# Altium PCB EnviroNode.PcbDoc
Units mil, origin at the board's own origin, x right, y up, seen from the top; angles counter-clockwise.
Board outline 2780 x 1840 mil, 2 copper layers (Top Layer, Bottom Layer); 53 components, 47 nets, 266 pads, 136 vias.
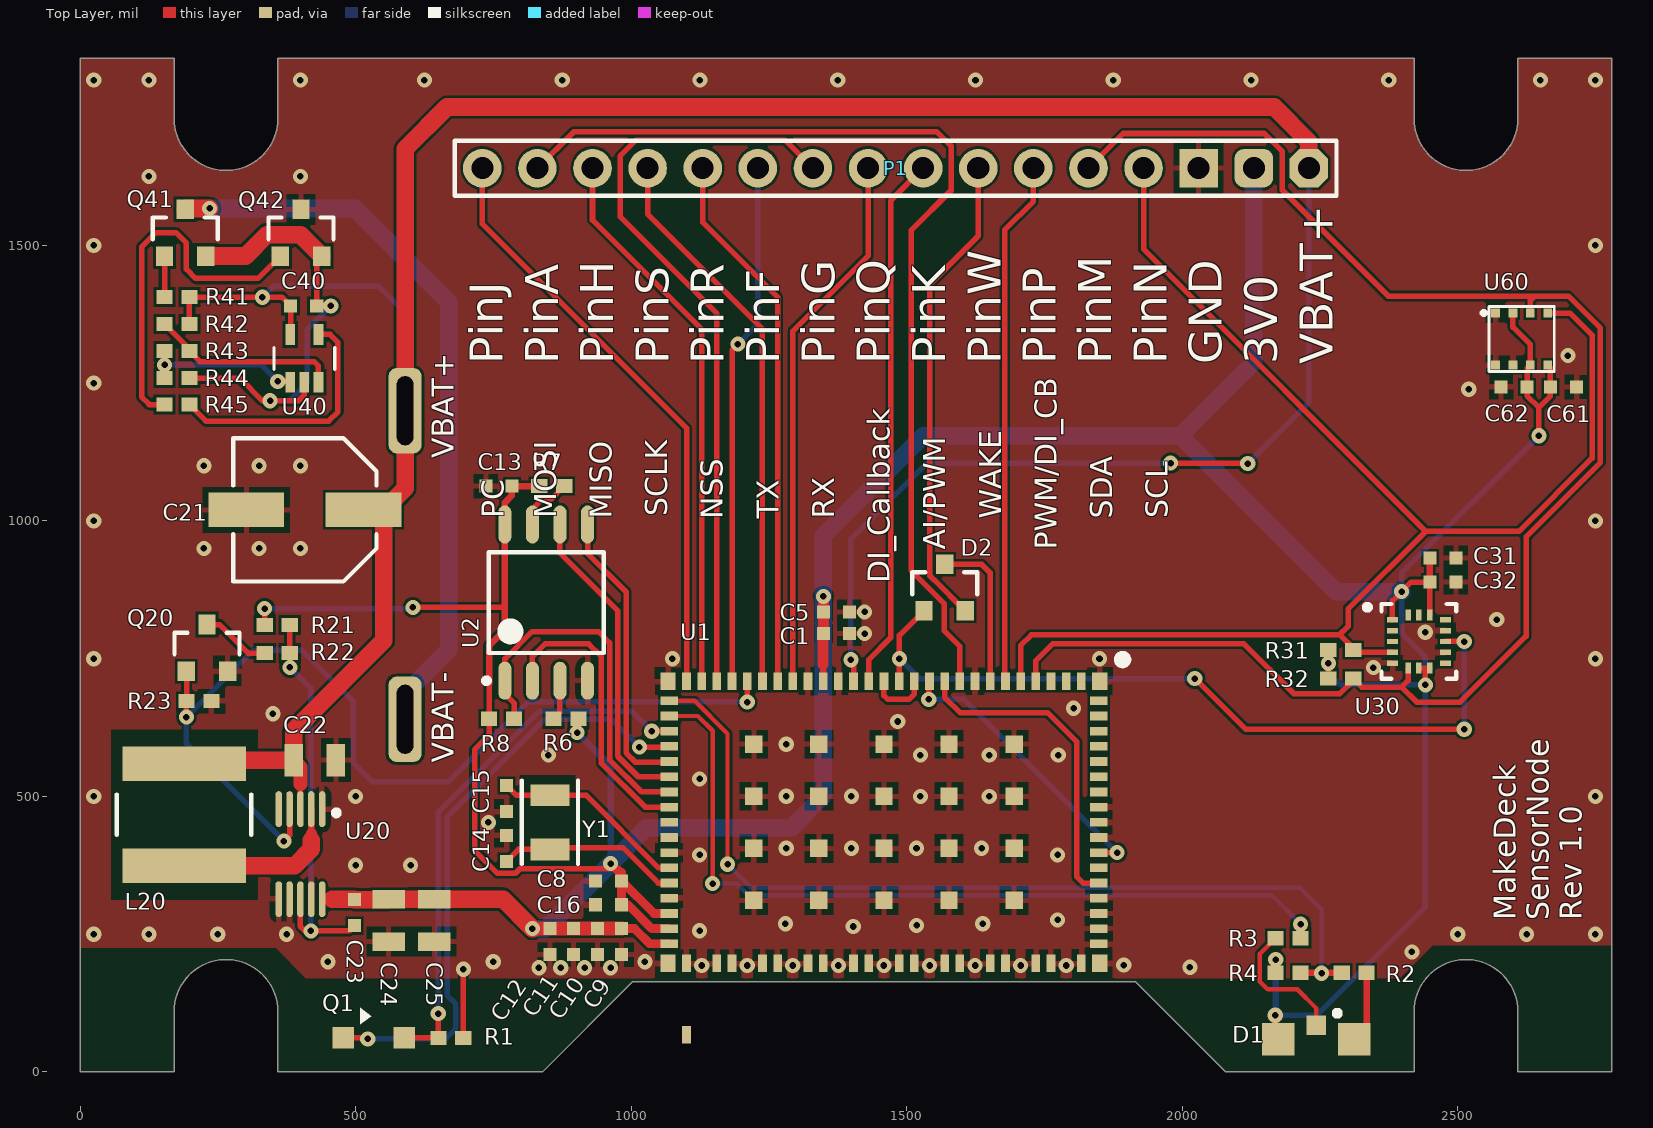
[diagram p0: Top Layer view]
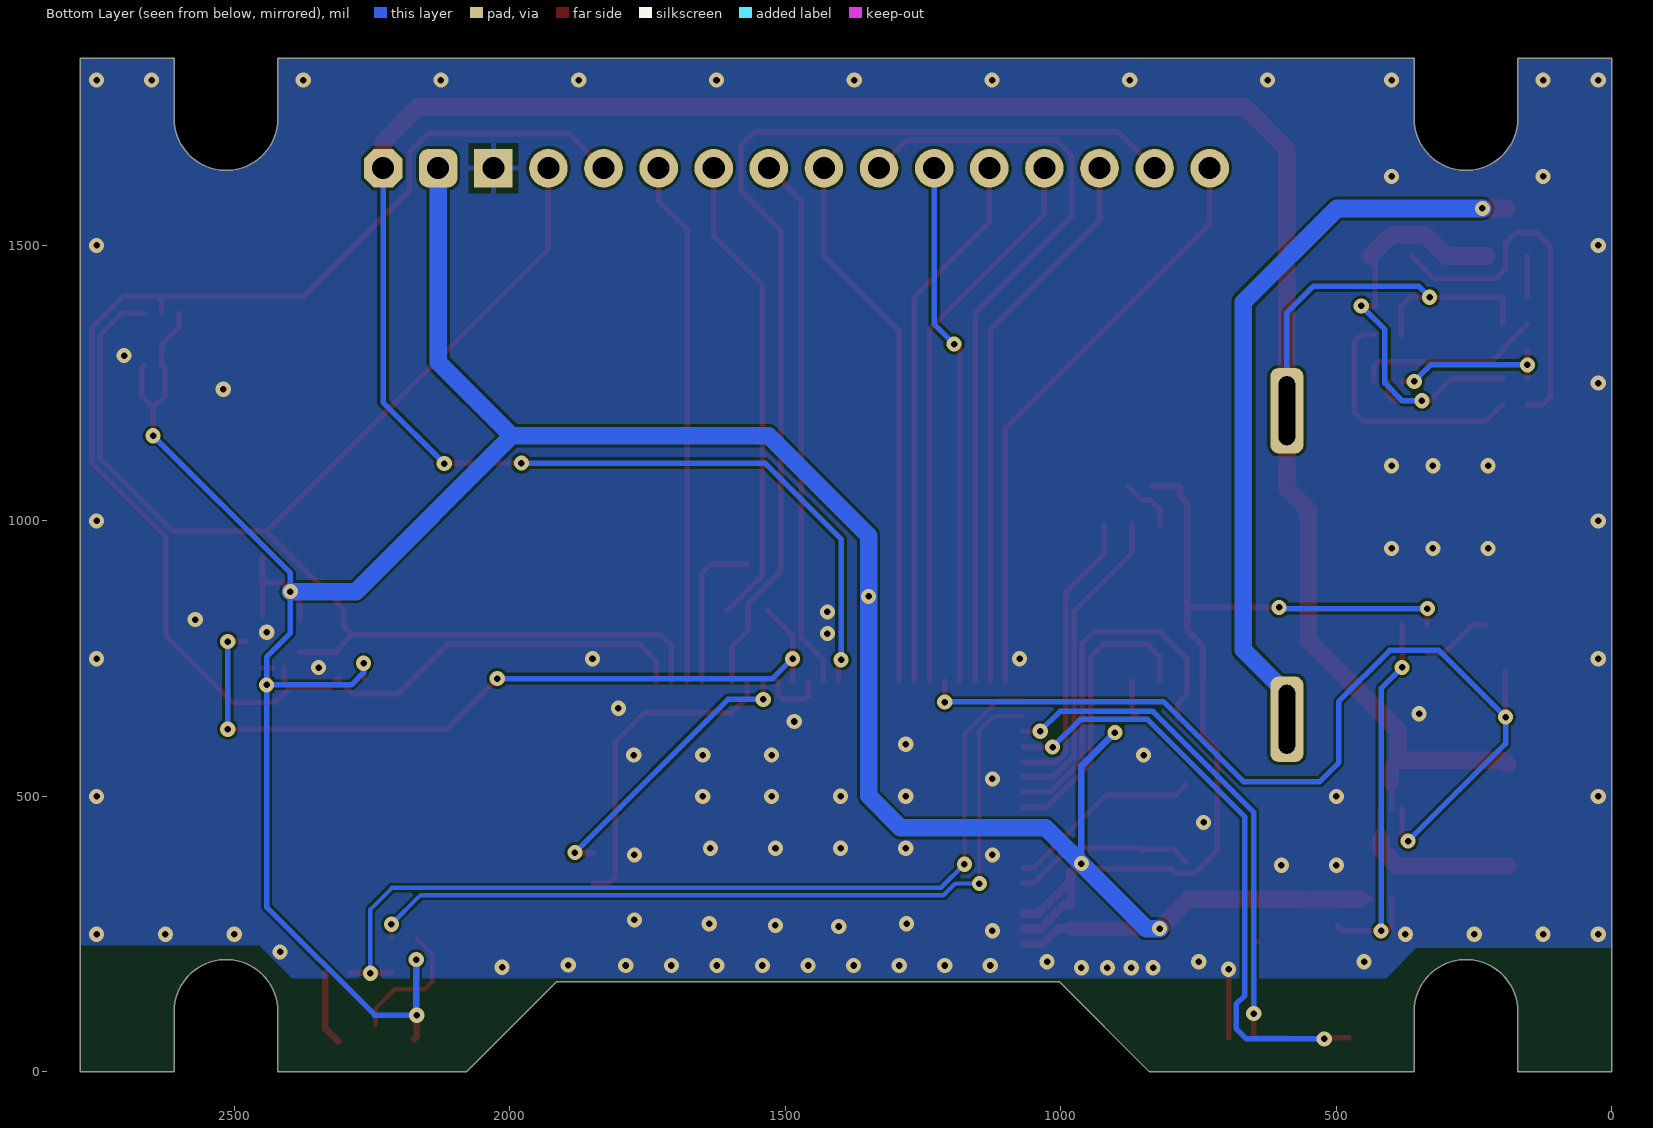
[diagram p1: Bottom Layer view, seen from below]
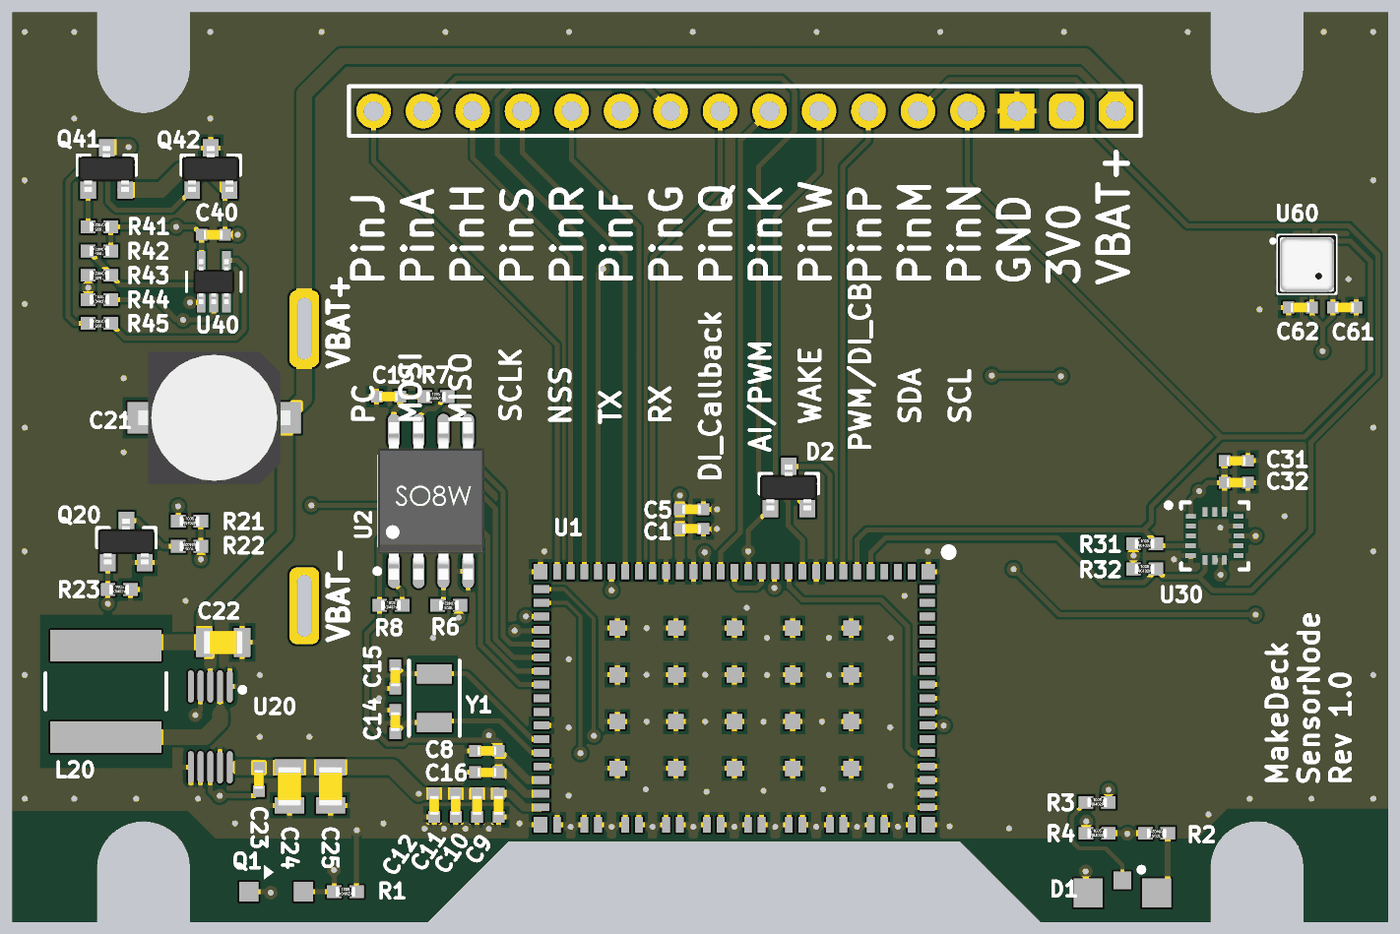
[diagram p2: 3D render of the assembled board from above, using the file's embedded part models]

## Layer stack, top to bottom
Top Solder: solder mask 0.4, Solder Resist, Dk 3.5
Top Layer: signal copper 1.4
Dielectric 1: dielectric 12.6, FR-4, Dk 4.8
Bottom Layer: signal copper 1.4
Bottom Solder: solder mask 0.4, Solder Resist, Dk 3.5

## Board outline
171,0 171,110 cw(c265,110) 359,110 359,0 839,0 1003,164 1450,164 1915,164 2079,0 2421,0 2421,110 cw(c2515,110) 2609,110 2609,0 2780,0 2780,1840 2609,1840 2609,1730 cw(c2515,1730) 2421,1730 2421,1840 359,1840 359,1730 cw(c265,1730) 171,1730 171,1840 0,1840 0,0

## Design rules (kind name [scope] priority, off if disabled: settings)
Clearance [All] p1: gap=5
PolygonConnect "Direct Connect GND Via" [InNet('GND') AND (IsVia)] p1: connectstyle=Direct reliefconductorwidth=10 reliefentries=4 polygonreliefangle="90 Angle" airgapwidth=10
PolygonConnect [All] p2: connectstyle=Relief reliefconductorwidth=10 reliefentries=4 polygonreliefangle="90 Angle" airgapwidth=10
RoutingVias [All] p1: holewidth=11.81 width=27.56 viastyle="Through Hole" minholewidth=11.81 minwidth=27.56 maxholewidth=19.68 maxwidth=31.5
SolderMaskExpansion [All] p1: expansion=4
Width "VBAT+ Power Trace" [(InNet('VBAT+') OR InNet('VBAT-'))] p1: maxlimit=32 minlimit=10 preferedwidth=32 minimp=50.000000 maximp=50.000000 favimp=50.000000
Width "L20 Trace" [InNet('NetL20_1')] p2: maxlimit=32 minlimit=10 preferedwidth=32 minimp=50.000000 maximp=50.000000 favimp=50.000000
Width "3V3 Power Trace" [InNet('3V3')] p3: maxlimit=60 minlimit=10 preferedwidth=16 minimp=50.000000 maximp=50.000000 favimp=50.000000
Width [All] p4: maxlimit=32 minlimit=6 preferedwidth=10 minimp=50.000000 maximp=50.000000 favimp=50.000000
30 further rules are at their usual default settings.

## Components (designator, comment, footprint, x,y, rotation, side; value= is the part's Value field where it differs from the comment)
C1 "CAP CER 0.1UF 10V X5R 0402" CAPC1005X07N#1 1372.58,795.59 r180 top
C5 "CAP CER 4.7UF 6.3V X5R 0402" CAPC1005X07N#1 1372.58,834.96 r180 top
C8 "CAP CER 0.1UF 10V X5R 0402" CAPC1005X07N#1 958.88,346.77 r0 top
C9 "CAP CER 0.1UF 10V X5R 0402" CAPC1005X07N#2 982.5,236.54 r90 top
C10 "CAP CER 0.1UF 10V X5R 0402" CAPC1005X07N#1 939.2,236.54 r90 top
C11 "CAP CER 4.7UF 6.3V X5R 0402" CAPC1005X07N#1 895.89,236.54 r90 top
C12 "CAP CER 4.7UF 6.3V X5R 0402" CAPC1005X07N#1 852.58,236.54 r90 top
C13 "CAP CER 1.0UF 6.3V X7R 0402" CAPC1005X07N#1 760,1063 r0 top
C14 "CAP CER 2pF 6.3V X7R 0402" CAPC1005X07N#1 773.84,405.83 r270 top
C15 "CAP CER 2pF 6.3V X7R 0402" CAPC1005X07N#1 773.84,496.38 r90 top
C16 "CAP CER 1.0UF 6.3V X7R 0402" CAPC1005X07N#1 958.88,303.46 r0 top
C21 "Polarized Capacitor" UWT1C221MCL1GS 408,1020 r180 top
C22 "CAP CER 22UF 6.3V X5R 0805" CAPC2012X14N 426,566 r180 top
C23 "CAP CER 15PF 50V C0G/NP0 0402" CAPC1005X07N#1 498,289 r90 top
C24 "CAP CER 10UF 10V X5R 0805" CAPC2012X14N 560,275 r90 top
C25 "CAP CER 22UF 6.3V X5R 0805" CAPC2012X14N 643,275 r90 top
C31 "CAP CER 1.0UF 6.3V X7R 0402" CAPC1005X07N#1 2473,933 r180 top
C32 "CAP CER 0.1UF 10V X5R 0402" CAPC1005X07N#1 2473,889 r180 top
C40 "CAP CER 0.1UF 10V X5R 0402" CAPC1005X07N#1 406,1390 r180 top
C61 "CAP CER 0.1UF 10V X5R 0402" CAPC1005X07N#1 2692,1243 r180 top
C62 "CAP CER 0.1UF 10V X5R 0402" CAPC1005X07N#1 2602.38,1243 r0 top
D1 "LED Red and Green" LTST-S326KGJRKT 2243,59.37 r0 top
D2 "Dual Schottky Diode" SOT95P300X130-3N 1569,879 r90 top
L20 "NR6028T4R7M" INDP6060X28N 189,467 r270 top
P1 "Header 16" HDR1X16 730,1640 r0 top
Q1 "PHOTOTRANSISTOR" PT12-21C 533,62 r0 top
Q20 "N-Channel MOSFET" SOT95P300X130-3N 230.4,769.68 r90 top
Q41 "N-Channel MOSFET" SOT95P300X130-3N 190.76,1523 r90 top
Q42 "N-Channel MOSFET" SOT95P300X130-3N 401,1523 r90 top
R1 "RES SMD 22K OHM 1% 1/16W 0402" RESC1005X04N 673,62 r0 top
R2 "RES SMD 100 OHM 5% 1/16W 0402" RESC1005X04N 2312,180 r180 top
R3 "RES SMD 100 OHM 5% 1/16W 0402" RESC1005X04N 2192,242.67 r0 top
R4 "RES SMD 10K OHM 1% 1/16W 0402" RESC1005X04N 2192,180 r0 top
R6 "RES SMD 100K OHM 5% 1/16W 0402" RESC1005X04N 882,641 r180 top
R7 "RES SMD 100K OHM 5% 1/16W 0402" RESC1005X04N 856,1063 r0 top
R8 "RES SMD 100K OHM 5% 1/16W 0402" RESC1005X04N 765,641 r0 top
R21 "RES SMD 220K OHM 1% 1/16W 0402" RESC1005X04N 358,811 r0 top
R22 "RES SMD 43K OHM 1% 1/16W 0402" RESC1005X04N 358,760 r180 top
R23 "RES SMD 100K OHM 5% 1/16W 0402" RESC1005X04N 216,673 r0 top
R31 "RES SMD 10K OHM 1% 1/16W 0402" RESC1005X04N 2287.94,765.45 r0 top
R32 "RES SMD 10K OHM 1% 1/16W 0402" RESC1005X04N 2287.94,714.27 r0 top
R41 "RES SMD 100K OHM 5% 1/16W 0402" RESC1005X04N 176,1406 r180 top
R42 "RES SMD 1M OHM 1% 1/16W 0402" RESC1005X04N 176,1357 r180 top
R43 "RES SMD 1M OHM 1% 1/16W 0402" RESC1005X04N 176,1308 r180 top
R44 "RES SMD 1M OHM 1% 1/16W 0402" RESC1005X04N 176,1259 r0 top
R45 "RES SMD 1M OHM 1% 1/16W 0402" RESC1005X04N 176,1211 r180 top
U1 "Murata Imp004m Module" LBEE5ZZ1MD 1458.88,453.07 r180 top
U2 "IC FLASH 128MBIT 104MHZ 8SOP" SOP127P790X216-8N 846,851.73 r90 top
U20 "XC9128" MSOP50P490X116-10N 400,395.31 r270 top
U30 "LIS3DHTR" LGA50P300X300X100-16N-ST 2429.67,781.2 r0 top
U40 "MIC841" SOT65P200X125-5N 407,1295 r90 top
U60 "BME680" BME680 2616,1330 r0 top
Y1 "XTAL_COMPACT" XTAL_32X15X09-2N 852.58,453.07 r90 top

## Footprints (in the part's own frame and the unit in brackets; to place one, negate y for a bottom-side part, rotate by r counter-clockwise, add the part's x,y. Pads: shape width x height; smd on the part's side, far side on the other; paste and mask are expansions set on the pad)
BME680 [mm]
  rect 0.4x0.4 smd: 1(-1.2,1.2) 2(-0.4,1.2) 3(0.4,1.2) 4(1.2,1.2) 5(1.2,-1.2) 6(0.4,-1.2) 7(-0.4,-1.2) 8(-1.2,-1.2)
  silkscreen extent -1.81,-1.5 1.5,1.5, body extent -1.5,-1.5 1.5,1.5, height 0.95
CAPC1005X07N#1 [mm]
  rect 0.6x0.6 smd: 1(-0.6,0) 2(0.6,0)
  body extent -0.5,-0.25 0.5,0.25, height 0.6
CAPC1005X07N#2 [mm]
  rect 0.6x0.6 smd: 1(-0.6,-0.002) 2(0.6,0)
  body extent -0.5,-0.25 0.5,0.25, height 0.6
CAPC2012X14N [mm]
  rect 0.85x1.5 smd: 1(-0.975,0) 2(0.975,0)
  body extent -1,-0.6 1,0.6, height 1.4
HDR1X16 [mil] "Connector; Header; 16 Position"
  round 70 hole 40: 1(0,0) 2(100,0) 3(200,0) 4(300,0) 5(400,0) 6(500,0) 7(600,0) 8(700,0) 9(800,0) 10(900,0) 11(1000,0) 12(1100,0) 13(1200,0)
  rect 70x70 hole 40: 14(1300,0)
  rrect50% 70x70 hole 40: 15(1400,0)
  oct 70x70 hole 40: 16(1500,0)
  silkscreen extent -50,-50 1550,50
INDP6060X28N [mm]
  rect 1.6x5.7 smd: 1(-2.35,0) 2(2.35,0)
  silkscreen extent -0.92,-3.1 0.92,3.1, body extent -3.1,-3.1 3.1,3.1, height 2.8
LBEE5ZZ1MD [mm] "Murata Imp004m Module"
  rect 0.7x0.8 smd: 1(-9.95,-6.5) 29(9.95,-6.5) 47(9.95,6.5) 66(-9.95,6.5)
  rect 0.4x0.8 smd: 2(-9.1,-6.5) 3(-8.4,-6.5) 4(-7.7,-6.5) 5(-7,-6.5) 6(-6.3,-6.5) 7(-5.6,-6.5) 8(-4.9,-6.5) 9(-4.2,-6.5) 10(-3.5,-6.5) 11(-2.8,-6.5) 12(-2.1,-6.5) 13(-1.4,-6.5) 14(-0.7,-6.5) 15(0,-6.5) 16(0.7,-6.5) 17(1.4,-6.5) 18(2.1,-6.5) 19(2.8,-6.5) 20(3.5,-6.5) 21(4.2,-6.5) 22(4.9,-6.5) 23(5.6,-6.5) 24(6.3,-6.5) 25(7,-6.5) 26(7.7,-6.5) 27(8.4,-6.5) 28(9.1,-6.5) 48(9.1,6.5) 49(7.7,6.5) 50(7,6.5) 51(5.6,6.5) 52(4.9,6.5) 53(3.5,6.5) 54(2.8,6.5) 55(1.4,6.5) 56(0.7,6.5) 57(-0.7,6.5) 58(-1.4,6.5) 59(-2.8,6.5) 60(-3.5,6.5) 61(-4.9,6.5) 62(-5.6,6.5) 63(-7,6.5) 64(-7.7,6.5) 65(-9.1,6.5) 104(9.1,9.8)
  rect 0.8x0.4 smd: 30(9.9,-5.6) 31(9.9,-4.9) 32(9.9,-4.2) 33(9.9,-3.5) 34(9.9,-2.8) 35(9.9,-2.1) 36(9.9,-1.4) 37(9.9,-0.7) 38(9.9,0) 39(9.9,0.7) 40(9.9,1.4) 41(9.9,2.1) 42(9.9,2.8) 43(9.9,3.5) 44(9.9,4.2) 45(9.9,4.9) 46(9.9,5.6) 67(-9.9,5.6) 68(-9.9,4.9) 69(-9.9,4.2) 70(-9.9,3.5) 71(-9.9,2.8) 72(-9.9,2.1) 73(-9.9,1.4) 74(-9.9,0.7) 75(-9.9,0) 76(-9.9,-0.7) 77(-9.9,-1.4) 78(-9.9,-2.1) 79(-9.9,-2.8) 80(-9.9,-3.5) 81(-9.9,-4.2) 82(-9.9,-4.9) 83(-9.9,-5.6)
  rect 0.8x0.8 smd: 84(-6,-3.6) 85(-3,-3.6) 86(0,-3.6) 87(3,-3.6) 88(6,-3.6) 89(6,-1.2) 90(6,1.2) 91(6,3.6) 92(3,3.6) 93(0,3.6) 94(-3,3.6) 95(-6,3.6) 96(-6,1.2) 97(-6,-1.2) 98(-3,-1.2) 99(0,-1.2) 100(3,-1.2) 101(3,1.2) 102(0,1.2) 103(-3,1.2)
  silkscreen extent -11.2,-7.7 -10.8,-7.3, body extent -10.5,-7.1 10.5,10.4, height 2
LGA50P300X300X100-16N-ST [mm]
  rect 0.5x0.25 smd paste+0 mask+0.025: 1(-1.225,1)
  rect 0.5x0.25 smd mask+0.025: 2(-1.225,0.5) 3(-1.225,0) 4(-1.225,-0.5) 5(-1.225,-1) 9(1.225,-1) 10(1.225,-0.5) 11(1.225,0) 12(1.225,0.5) 13(1.225,1)
  rect 0.25x0.5 smd mask+0.025: 6(-0.5,-1.225) 7(0,-1.225) 8(0.5,-1.225) 14(0.5,1.225) 15(0,1.225) 16(-0.5,1.225)
  silkscreen extent -2.5,-1.73 1.73,1.73, body extent -1.58,-1.58 1.58,1.58, height 1
LTST-S326KGJRKT [mm]
  rect 1.5x1.5 smd: A(-1.75,0) KR(1.75,0)
  rect 0.9x0.9 smd: KG(0,0.65)
  silkscreen extent 0.85,1.07 1.1,1.33, body extent -1.5,-1.5 1.5,0.5, height 1
MSOP50P490X116-10N [mm]
  oval 1.65x0.3 smd: 1(-2.075,1) 2(-2.075,0.5) 3(-2.075,0) 4(-2.075,-0.5) 5(-2.075,-1) 6(2.075,-1) 7(2.075,-0.5) 8(2.075,0) 9(2.075,0.5) 10(2.075,1)
  silkscreen extent -2.03,1.53 -1.78,1.78, body extent -1.55,-1.55 1.55,1.55, height 1.16
PT12-21C [mm]
  rect 1x1 smd: C(-1.4,0) E(1.4,0)
  silkscreen extent -0.63,0.63 -0.13,1.37, body extent -1.5,-1.51 1.5,0.5, height 1
RESC1005X04N [mm] "Chip Resistor, 2-Leads, Body 1.0x0.5mm, IPC Medium Density"
  rect 0.75x0.65 smd: 1(-0.575,0) 2(0.575,0)
  body extent -0.5,-0.25 0.5,0.25, height 0.35
SOP127P790X216-8N [mm] "SOP, 8-Leads, Body 5.23x5.28mm, Pitch 1.27mm, IPC Medium Density"
  oval 1.75x0.6 smd: 1(-3.6,1.905) 2(-3.6,0.635) 3(-3.6,-0.635) 4(-3.6,-1.905) 5(3.6,-1.905) 6(3.6,-0.635) 7(3.6,0.635) 8(3.6,1.905)
  silkscreen extent -3.72,-2.65 2.32,2.88, body extent -4.05,-2.73 4.05,2.73, height 1.75
SOT65P200X125-5N [mm]
  rect 0.95x0.45 smd paste+0 mask+0.05: 1(-1.1,0.65) 2(-1.1,0) 3(-1.1,-0.65) 4(1.1,-0.65) 5(1.1,0.65)
  silkscreen extent -0.5,-1.4 0.5,1.4, body extent -1.15,-1.05 1.15,1.05, height 1
SOT95P300X130-3N [mm]
  rect 0.9x0.8 smd: 1(-1.075,0.95) 2(-1.075,-0.95) 3(1.075,0)
  silkscreen extent -0.3,-1.5 0.7,1.5, body extent -1.17,-1.45 1.17,1.47, height 1
UWT1C221MCL1GS [mm]
  rect 3.5x1.6 smd: 1(-2.7,0) 2(2.7,0)
  silkscreen extent -3.3,-3.3 3.3,3.3, body extent -3.9,-3.4 3.9,3.4, height 8.05
XTAL_32X15X09-2N [mm] "TUNING FORK CRYSTAL, 2PIN"
  rect 1x1.8 smd: 1(-1.25,0) 2(1.25,0)
  silkscreen extent -1.92,-1.3 1.92,1.3, body extent -1.75,-0.9 1.75,0.9, height 0.9

## Part data
C21: "CAP,ALUM POLYMER,220uF,20%,16V,SMD"
D1: "LED, Dual, Side-view, Red-Green,2V, Common Anode, SMT"
D2: "DIODE, Schottky, 200mA, 30V, Dual, Common Cathode, SOT23"
L20: "FIXED IND 4.7UH 3A 40.3 MOHM SMD"
P1: "Header, 16-Pin"
Q1: "Phototrans, Clear, Side-view, 940nm, 0.4V, 1.14mA, SMT"
Q20: "NFET"
Q41 Q42: "NFET, 20V, 4.2A, SOT23"
U1: library part LBEE5ZZ1MD
U20: "IC, DC/DC boost,Adjustable, 6 VIN, 500mA, MSOP10"
U30: "IC, Accelerometer, 3-Axis, Low Power, 16-bit, LGA16"
U40: "IC, Comparator with Reference and Programmable Hysteresis, SOT-353"
U60: "Integrated Environmental Unit"
Y1: "XTAL, 32.768kHz, 20ppm, 6pF, 60K Ohm, 3215"

## Free pads (board coordinates)
  rrect50% 60x155 hole 30 slot 125 at 90 deg: 16(590,640) 16(590,1200)

## Via types
v1: diameter 27.56, hole 11.81, Top Layer to Bottom Layer, tented both sides, 136 vias

## Nets (pads, with @x,y where several pads share a name; then routed paths per layer and width w, separated by ;. In a path a pad name is that pad's centre, name@x,y a point inside that pad or via, vN(x,y) a via of type N, cw(c..) or ccw(c..) an arc to the next point about the centre after c; other vN are vias at no path point)
3V0: C1.2 C5.2 C8.2 C9.2 C10.2 C11.2 C12.2 C13.2 C16.2 C23.2 C24.2 C25.2 C31.2 C32.2 C61.2 C62.2 D1.A P1.15 R4.1 R6.1 R7.1 R8.1 R21.1 R31.1 R32.1 U1.19 U1.44 U1.45 U1.46 U2.8 U20.10 U30.1 U30.7 U30.8 U30.14 U60.2 U60.5 U60.6 | length 8093.3
  Top Layer w10: v1(335,841) 335.36,840.64 R21.1 ; v1(604,843) 769,843 771,841 ; 742.36,704.64 R8.1 742.36,611.38 716,585.02 716,402.28 757.89,360.39 789.8,360.39 797.98,368.58 972.5,368.58 978.57,368.58 978.57,362.52 ; R32.1 v1(2265.3,741.83) ; U30.1 2381.44,855.02 v1(2398.17,871.75) 2415.4,888.98 C32.2 U30.14 ; U30.7 2439.51,732.97 ; v1(2441.48,702.46) 2441.48,731 2439.51,732.97 ; U30.8 2439.51,732.97 ; U60.2 2600.25,1351.75 2631.75,1320.25 U60.6 2626,1277.01 C62.2 2626,1227 2647.5,1205.5 ; v1(2647.5,1154.5) 2647.5,1205.5 ; U60.5 2668.38,1277.62 C61.2 2668.38,1226.38 2647.5,1205.5
  Top Layer w12: U20.10 457.61,313.61 ; 742.36,704.64 742.36,773.36 771,802 771,841 U2.8 771,1033.24 783.62,1045.86 C13.2 R7.1 ; U1.19 1348.65,739.65 ; v1(2169,103) 2169,64.47 D1.A ; R4.1 2169.36,203.36 v1(2170,204) ; C32.2 C31.2
  Top Layer w16: v1(962.82,378.27) 972.5,368.58 978.57,362.52 ; C9.2 1006.13,260.16 1033.68,232.6 U1.46 ; 982.5,362.52 C8.2 ; U1.45 1037.62,260.16 994.32,303.46 C16.2 C8.2 ; U1.44 1041.56,287.72 C8.2
  Top Layer w20: 1348.65,739.65 1348.65,795.28 C1.2 C5.2 v1(1348.96,862.96)
  Top Layer w25: v1(821.09,260.16) C12.2 C11.2 C10.2 C9.2
  Top Layer w32: 457.61,313.61 497.01,313.61 C23.2 559.24,312.62 C24.2 C25.2 767.86,313.39 v1(821.09,260.16)
  Bottom Layer w10: v1(335,841) 602,841 v1(604,843) ; v1(2169,103) 2245,103 2441.48,299.48 v1(2441.48,702.46) ; v1(2265.3,741.83) 2265.3,724.7 2287.54,702.46 v1(2441.48,702.46) ; v1(2647.5,1154.5) 2398.17,905.17 v1(2398.17,871.75) 2398.17,796.31 2441.48,753 v1(2441.48,702.46)
  Bottom Layer w12: v1(902,616) 962.82,555.18 v1(962.82,378.27) ; v1(2169,103) 2170,104 v1(2170,204)
  Bottom Layer w32: v1(821.09,260.16) 844.71,260.16 v1(962.82,378.27) 1027.55,443 1291,443 1348.96,500.96 v1(1348.96,862.96) 1348.96,972.96 1530.5,1154.5 1996.5,1154.5 ; P1.15 2130,1288 1996.5,1154.5 ; v1(2398.17,871.75) 2279.25,871.75 1996.5,1154.5
ACCEL_INT: D2.1 U1.14 U30.11 | length 1417.6
  Top Layer w10: U1.14 1487,709.54 v1(1487,750) 1487,792.08 D2.1 ; v1(2023,714) 2115,622 v1(2512,622) ; U30.11 2511.8,781.2 v1(2512,781)
  Bottom Layer w10: v1(1487,750) 1523,714 v1(2023,714) ; v1(2512,622) v1(2512,781)
BT_REG_ON: U1.3
BT_UART_RXD: U1.12 U1.73 | length 524.1
  Top Layer w10: v1(1540,676) 1540,707.42 U1.12 ; U1.73 v1(1882,398) v1(1882,398)
  Bottom Layer w10: v1(1540,676) 1604,676 v1(1882,398)
BT_UART_TXD: U1.11 U1.71 | length 591.7
  Top Layer w10: U1.11 1569.12,679.88 1597,652 1756,652 1809,599 1809,354 1820.17,342.83 U1.71
GND: C1.1 C5.1 C8.1 C9.1 C10.1 C11.1 C12.1 C13.1 C14.1 C15.1 C16.1 C21.2 C22.1 C24.1 C25.1 C31.1 C32.1 C61.1 C62.1 P1.14 Q20.2 Q42.3 R1.2 R23.2 U1.1 U1.9 U1.18 U1.20 U1.29 U1.40 U1.43 U1.47 U1.48 U1.49 U1.50 U1.51 U1.52 U1.53 U1.54 U1.55 U1.56 U1.57 U1.58 U1.59 U1.60 U1.61 U1.62 U1.63 U1.64 U1.65 U1.66 U1.67 U1.68 U1.69 U1.70 U1.74 U1.75 U1.76 U1.84 U1.85 U1.86 U1.87 U1.88 U1.89 U1.90 U1.91 U1.92 U1.93 U1.94 U1.95 U1.96 U1.97 U1.98 U1.99 U1.100 U1.101 U1.102 U1.103 U2.4 U20.1 U20.6 U20.7 U20.9 U30.5 U30.10 U30.12 U60.1 U60.7 U60.8 | length 127.8
  Top Layer w10: C25.1 C25.1@646.39,236.61 ; R1.2 695.64,186.03 v1(695.9,186.29)
  other v1: 832.9,189.29 872.27,189.29 915.57,189.29 962.82,189.29 2014,190 1128.17,193.23 1210.85,193.23 1293.53,193.23 1376.2,193.23 1458.88,193.23 1541.56,193.23 1624.24,193.23 1706.91,193.23 1789.59,193.23 1894,194 450,200 750,200 1025,200 2417,218 25,250 125,250 250,250 375,250 2500,250 2625,250 2750,250 1124.24,256.22 1403,264 1518,266 1280,269 1638,269 1773.84,275.91 500,375 600,375 1124.24,394.02 1773.84,394.02 1281.72,405.83 1399.83,405.83 1517.94,405.83 1636.05,405.83 741,453 25,500 500,500 1281.72,500.32 1399.83,500.32 1525,500 1650,500 2750,500 1124.24,531.81 850,575 1525,575 1650,575 1775,575 1281.72,594.8 1484,636 350,650 1803,660 2346.99,733.95 25,750 1075,750 1850,750 2750,750 1423.76,795.59 2441,798 2571,821 1423.76,834.96 225,950 325,950 400,950 25,1000 2750,1000 225,1100 325,1100 400,1100 2520,1239 25,1250 2700,1300 25,1500 2750,1500 125,1625 400,1625 25,1800 125,1800 400,1800 625,1800 875,1800 1125,1800 1375,1800 1625,1800 1875,1800 2125,1800 2375,1800 2650,1800 2750,1800
IMP_WAKE: D2.3 U1.8 | length 286
  Top Layer w10: D2.3 1636.21,921.32 1651.8,905.74 U1.8
LED_GREEN: R3.2 U1.31 | length 1490.2
  Top Layer w8: U1.31 1121.02,645.98 1148,619 v1(1148,342) ; R3.2 2215,243.03 v1(2215,268)
  Bottom Layer w8: v1(1148,342) 1191.62,342 1212.62,321 2162,321 v1(2215,268)
LED_RED: R2.2 R4.2 U1.30 | length 1670.2
  Top Layer w8: U1.30 1115.46,673.54 1175,614 v1(1175,377)
  Top Layer w12: R4.2 R2.2
  Bottom Layer w8: v1(1175,377) 1217.88,334.12 1645.48,334.12 1645.6,334 2214,334 2253,295 v1(2253,179)
LPO_IN: U1.13 U1.15 | length 111
  Top Layer w10: U1.15 1458.88,683.12 1466,676 1504,676 1514,686 U1.13
NetC14_2: C14.2 U1.42 Y1.1 | length 332.2
  Top Layer w10: C14.2 795.5,403.86 Y1.1 855.77,407.05 985.22,407.05 1049.43,342.83 U1.42
NetC15_2: C15.2 U1.41 Y1.2 | length 357.2
  Top Layer w10: C15.2 791.56,502.28 Y1.2 918.27,502.28 1050.16,370.39 U1.41
NetC23_1: C23.1 R21.2 R22.1 U20.8 | length 725.7
  Top Layer w10: R21.2 R22.1 380.64,734.36 v1(381,734) ; U20.8 400,264 408,256 v1(419,256) 488.62,256 C23.1
  Bottom Layer w10: v1(381,734) 419,696 v1(419,256)
NetC40_1: C40.1 Q41.2 Q42.2 R44.2 U40.2 | length 852.7
  Top Layer w10: R44.2 290,1259 331,1218 v1(345,1218) 396,1218 407,1229 U40.2 ; Q42.2 429.62,1471.9 C40.1 v1(455,1390)
  Top Layer w32: Q41.2 300.44,1480.68 339.15,1519.39 388.04,1519.39 388.44,1519 400.08,1519 Q42.2
  Bottom Layer w10: v1(345,1218) 380,1218 412,1250 412,1347 v1(455,1390)
NetD1_KG: D1.KG R3.1 | length 243.3
  Top Layer w8: R3.1 2141,214.3 2141,164 2155,150 2209,150 2243,116 D1.KG
NetD1_KR: D1.KR R2.1 | length 133.2
  Top Layer w12: D1.KR@2311.9,56.24 2334.64,78.98 R2.1
NetL20_2: L20.2 U20.2 | length 315.5
  Top Layer w12: 419.69,432.31 U20.2
  Top Layer w20: 419.69,420.69 419.69,432.31
  Top Layer w32: L20.2 389.48,374.48 419.69,404.69 419.69,420.69
NetQ20_3: Q20.3 R22.2 | length 126.5
  Top Layer w10: Q20.3 253,812 305,760 R22.2
NetQ41_1: Q41.1 R41.2 | length 74.7
  Top Layer w10: R41.2 Q41.1
NetQ42_1: Q42.1 R45.2 | length 660.3
  Top Layer w10: R45.2 126,1211 112,1225 112,1497 138,1523 174,1523 193,1504 193,1457 210,1440 322.92,1440 Q42.1
NetR6_2: R6.2 U2.3 | length 73.8
  Top Layer w10: R6.2 871,652.64 U2.3
NetR7_2: R7.2 U2.7 | length 103.2
  Top Layer w10: U2.7 821,1022 837,1038 853.64,1038 R7.2
NetR8_2: R8.2 U1.36 U2.1 | length 679.1
  Top Layer w10: R8.2 787.64,669.36 771,686 U2.1 771,749.78 820.22,799 941,799 961.22,778.78 961.22,566.35 1019.38,508.19 U1.36
NetR42_2: R42.2 R43.1 U40.3 | length 342.4
  Top Layer w10: R42.2 198.64,1311.72 R43.1 217.64,1289 425,1289 432.59,1281.41 U40.3
NetR43_2: R43.2 R44.1 U40.1 | length 290
  Top Layer w10: R44.1 v1(153.36,1283) R43.2 ; v1(359,1253) 380.1,1253 U40.1
  Bottom Layer w10: v1(153.36,1283) 329,1283 v1(359,1253)
NetR45_1: R45.1 U40.4 | length 456.2
  Top Layer w10: R45.1 228.64,1181 451,1181 468,1198 468,1324 453.69,1338.31 U40.4
NetU1_34: U1.34 U2.5 | length 529.1
  Top Layer w10: U2.5 921,941 991.22,870.78 991.22,579.8 991.72,579.3 991.72,578.28 1007.91,562.09 1067.9,562.09 U1.34
NetU1_35: U1.35 U2.6 | length 572.6
  Top Layer w10: U2.6 871,942 976.22,836.78 976.22,573.58 976.72,573.08 976.72,572.07 1013.04,535.75 U1.35
NetU1_37: U1.37 U2.2 | length 537.9
  Top Layer w10: U2.2 821,754 844,777 923.1,777 946.22,753.88 946.22,560.14 1025.73,480.63 U1.37
OPTO_BIAS: Q1.C U1.33 | length 1101.2
  Top Layer w10: Q1.C 520.2,62 v1(522.2,60) ; v1(1015,589.65) 1067.9,589.65 U1.33
  Bottom Layer w10: v1(522.2,60) 663,60 682,79 682,123 666,139 666,463 843,640 964.65,640 v1(1015,589.65)
OPTO_IN: Q1.E R1.1 U1.32 | length 981.9
  Top Layer w10: Q1.E R1.1 650.36,105.64 v1(650,106) ; v1(1037.62,618.43) U1.32
  Bottom Layer w10: v1(650,106) 650,471 834,655 1001.05,655 v1(1037.62,618.43)
PINA: P1.2 U1.10 | length 1827.1
  Top Layer w10: P1.2 896,1706 1555,1706 1581,1680 1581,1600 1508,1527 1508,910 1568,850 1568,801 1596.68,772.32 U1.10
PINF: P1.6 U1.25 | length 950.4
  Top Layer w10: U1.25 1183.29,1310.29 v1(1194,1321)
  Bottom Layer w10: v1(1194,1321) 1230,1357 P1.6
PING: P1.7 U1.26 | length 1409
  Top Layer w10: U1.26 1155.73,1376.27 980,1552 980,1662 1009,1691 1279,1691 P1.7
PINH: P1.3 U1.27 | length 1013.1
  Top Layer w10: P1.3 930,1546 1128.17,1347.83 U1.27
PINJ: P1.1 U1.28 | length 1084.5
  Top Layer w10: P1.1 730,1539 1100.61,1168.39 U1.28
PINK: P1.9 U1.16 | length 971.9
  Top Layer w10: U1.16 1431.32,748.32 1471,788 1471,1581 P1.9
PINP: P1.11 U1.7 | length 953.1
  Top Layer w10: U1.7 1678,710.33 1678,1528 1730,1580 P1.11
PINQ: P1.8 U1.21 | length 987.6
  Top Layer w10: U1.21 1293.53,1344.53 1430,1481 P1.8
PINR: P1.5 U1.22 | length 987.3
  Top Layer w10: P1.5 1130,1542 1265.97,1406.03 U1.22
PINS: P1.4 U1.23 | length 1017.3
  Top Layer w10: P1.4 1030,1557 1238.41,1348.59 U1.23
PINW_OR: D2.2 P1.10 | length 866.7
  Top Layer w10: D2.2 1549.47,893.61 1549.11,893.61 1542,900.72 1542,1429 1630,1517 P1.10
PSU_EN: Q20.1 R23.1 U1.24 U20.4 | length 1781.3
  Top Layer w10: v1(193,644) 193,672.64 R23.1 193.36,726.99 Q20.1 ; v1(370,419) 380.32,429.32 U20.4 ; v1(1210.85,671.15) U1.24
  Bottom Layer w10: v1(370,419) 193,596 v1(193,644) 314,765 403,765 496,672 496,561 530,527 669,527 814,672 1210,672 v1(1210.85,671.15) v1@1216,666
SCL: P1.13 R31.2 U1.6 U30.4 U60.4 | length 2563.7
  Top Layer w10: U1.6 1706.91,773.91 1726.24,793.24 2286.28,793.24 ; P1.13 1930,1493 2442,981 ; U30.4 2314.51,761.51 R31.2 2310.57,768.95 2286.28,793.24 ; U60.4 2703.76,1377.24 2744,1337 2744,1114 2611,981 2442,981 ; 2286.28,793.24 2286,793.52 2301.24,808.76 2301.24,840.24 2442,981
SDA: P1.12 R32.2 U1.5 U30.6 U60.3 | length 2889.7
  Top Layer w10: U1.5 1734.47,746.47 1765,777 2112,777 2202.53,686.47 2286.28,686.47 2310.57,710.77 R32.2 2326.32,698.52 2398.17,698.52 ; P1.12 1893,1703 2149,1703 2182,1670 2182,1600 2374,1408 2640,1408 ; U30.6 2409.98,710.33 2398.17,698.52 ; U60.3 2631.75,1400.75 2632.75,1400.75 2640,1408 ; 2398.17,698.52 2425.69,671 2504,671 2624,791 2624,971 2759,1106 2759,1350 2701,1408 2640,1408
VBAT+: C21.1 C22.2 C40.2 L20.1 P1.16 pad.16@590,1200 R41.1 R42.1 U1.17 U20.3 U40.5 | length 5611
  Top Layer w10: R42.1 R41.1 v1(331,1406) 366.38,1406 C40.2 382.38,1339.28 U40.5 U40.5@381.72,1338 ; U20.3 400,514.69 ; v1(1399,748) 1400,748 1403.76,744.24 U1.17 ; v1(1979,1105) 2118,1105 v1(2119,1104)
  Top Layer w12: 400,514.69 400,522
  Top Layer w25: C22.2 400,553.61 400,522
  Top Layer w32: L20.1 195.48,566 C22.2 387.61,619.61 551,783 551,1020 590,1059 590,1200 590,1675 666,1751 2167,1751 2230,1688 P1.16
  Bottom Layer w10: v1(331,1406) 351,1426 542,1426 590,1378 pad.16@590,1200 ; v1(1399,748) 1399,967 1537,1105 v1(1979,1105) ; v1(2119,1104) 2230,1215 P1.16
VBAT-: pad.16@590,640 Q41.3 | length 1339.1
  Top Layer w32: Q41.3 192.44,1567 v1(235,1567)
  Bottom Layer w32: v1(235,1567) 499,1567 669,1397 669,766 590,687 pad.16@590,640
pads on no net: U1.2 U1.4 U1.38 U1.39 U1.72 U1.77 U1.78 U1.79 U1.80 U1.81 U1.82 U1.83 U1.104 U20.5 U30.2 U30.3 U30.9 U30.13 U30.15 U30.16

## Polygon pours and split planes (outlines as drawn)
GND on Top Layer "Top Layer-GND" (solid, remove dead copper, pour order 3): 0,225 355,225 410,170 2395,170 2455,230 2780,230 2780,1840 2609,1840 2609,1730 cw(c2515,1730) 2421,1730 2421,1840 359,1840 359,1730 cw(c265,1730) 171,1730 171,1840 0,1840
GND on Bottom Layer "Bottom Layer-GND" (solid, pour order 4): 0,225 355,225 410,170 2395,170 2455,230 2780,230 2780,1840 2609,1840 2609,1730 cw(c2515,1730) 2421,1730 2421,1840 359,1840 359,1730 cw(c265,1730) 171,1730 171,1840 0,1840

## Other copper
Top Layer:
  pour cut-out: 323.5,312 56,312 56,622 323.5,622
  pour cut-out: 899.83,362.52 797.46,362.52 797.46,539.69 899.83,539.69

## Silkscreen, mask and mechanical layers (free items; w line width, h text height)
Top Overlay:
  text "PinJ" at 767,1284 h60 r90
  text "PinA" at 867.4,1284 h60 r90
  text "PinH" at 967.8,1284 h60 r90
  text "PinS" at 1068.2,1284 h60 r90
  text "PinR" at 1168.6,1284 h60 r90
  text "PinF" at 1269,1284 h60 r90
  text "PinG" at 1369.4,1284 h60 r90
  text "PinQ" at 1469.8,1284 h60 r90
  text "PinK" at 1570.2,1284 h60 r90
  text "PinW" at 1670.6,1284 h60 r90
  text "PinP" at 1771,1284 h60 r90
  text "PinM" at 1871.4,1284 h60 r90
  text "PinN" at 1971.8,1284 h60 r90
  text "GND" at 2072.2,1284 h60 r90
  text "3V0" at 2172.6,1284 h60 r90
  text "VBAT+" at 2273,1284 h60 r90
  text "VBAT+" at 678,1114 h40 r90
  text "SCLK" at 1065.82,1008 h40 r90
  text "PC" at 769,1005 h40 r90
  text "MOSI" at 864,1005 h40 r90
  text "SCL" at 1974,1005 h40 r90
  text "MISO" at 964.91,1004 h40 r90
  text "TX" at 1267.64,1004 h40 r90
  text "RX" at 1368.55,1004 h40 r90
  text "WAKE" at 1671.27,1004 h40 r90
  text "SDA" at 1873.09,1004 h40 r90
  text "NSS" at 1166.73,1003 h40 r90
  text "AI/PWM" at 1570.36,948 h40 r90
  text "PWM/DI_CB" at 1772.18,948 h40 r90
  text "DI_Callback" at 1469.45,887 h40 r90
  text "VBAT-" at 678,561 h40 r90
  text "MakeDeck / SensorNode / Rev 1.0" at 2725,275 h40 r90
Mechanical 2:
  lines w1: 2421,1730 ccw(c2515,1730) 2609,1730 2609,1840 2780,1840 2780,230 2455,230 2395,170 410,170 355,225 0,225 0,1840 171,1840 171,1730 ccw(c265,1730) 359,1730 359,1840 2421,1840 2421,1817.5 2421,1772 2421,1730.25
Mechanical 4:
  lines w1: 0,0 171,0 171,110 cw(c265,110) 359,110 359,0 839,0 1003,164 1915,164 2079,0 2421,0 2421,110 cw(c2515,110) 2609,110 2609,0 2780,0 2780,1840 2609,1840 2609,1730 cw(c2515,1730) 2421,1730 2421,1840 359,1840 359,1730 cw(c265,1730) 171,1730 171,1840 0,1840 0,0
  lines w10: 2832.01,64.92 2852.01,4.92 ; 2832.01,1784.92 2852.01,1844.92 ; 2842.01,4.92 2862.01,4.92 ; 2842.01,1844.92 2862.01,1844.92 ; 2852.01,649 2852.01,4.92 ; 2852.01,1200.83 2852.01,1844.92 ; 2872.01,64.92 2852.01,4.92 ; 2872.01,1784.92 2852.01,1844.92
  text "1840 (mil)" at 2888,659 h60 r90

## Dimensions
0,1840 to 2780,1840 on Mechanical 4